# Altium PCB receiver.PcbDoc
Units mm, origin at the board's own origin, x right, y up, seen from the top; angles counter-clockwise.
Board outline 95.88 x 55.37 mm, 2 copper layers (Top Layer, Bottom Layer); 19 components, 11 nets, 46 pads, 14 vias.
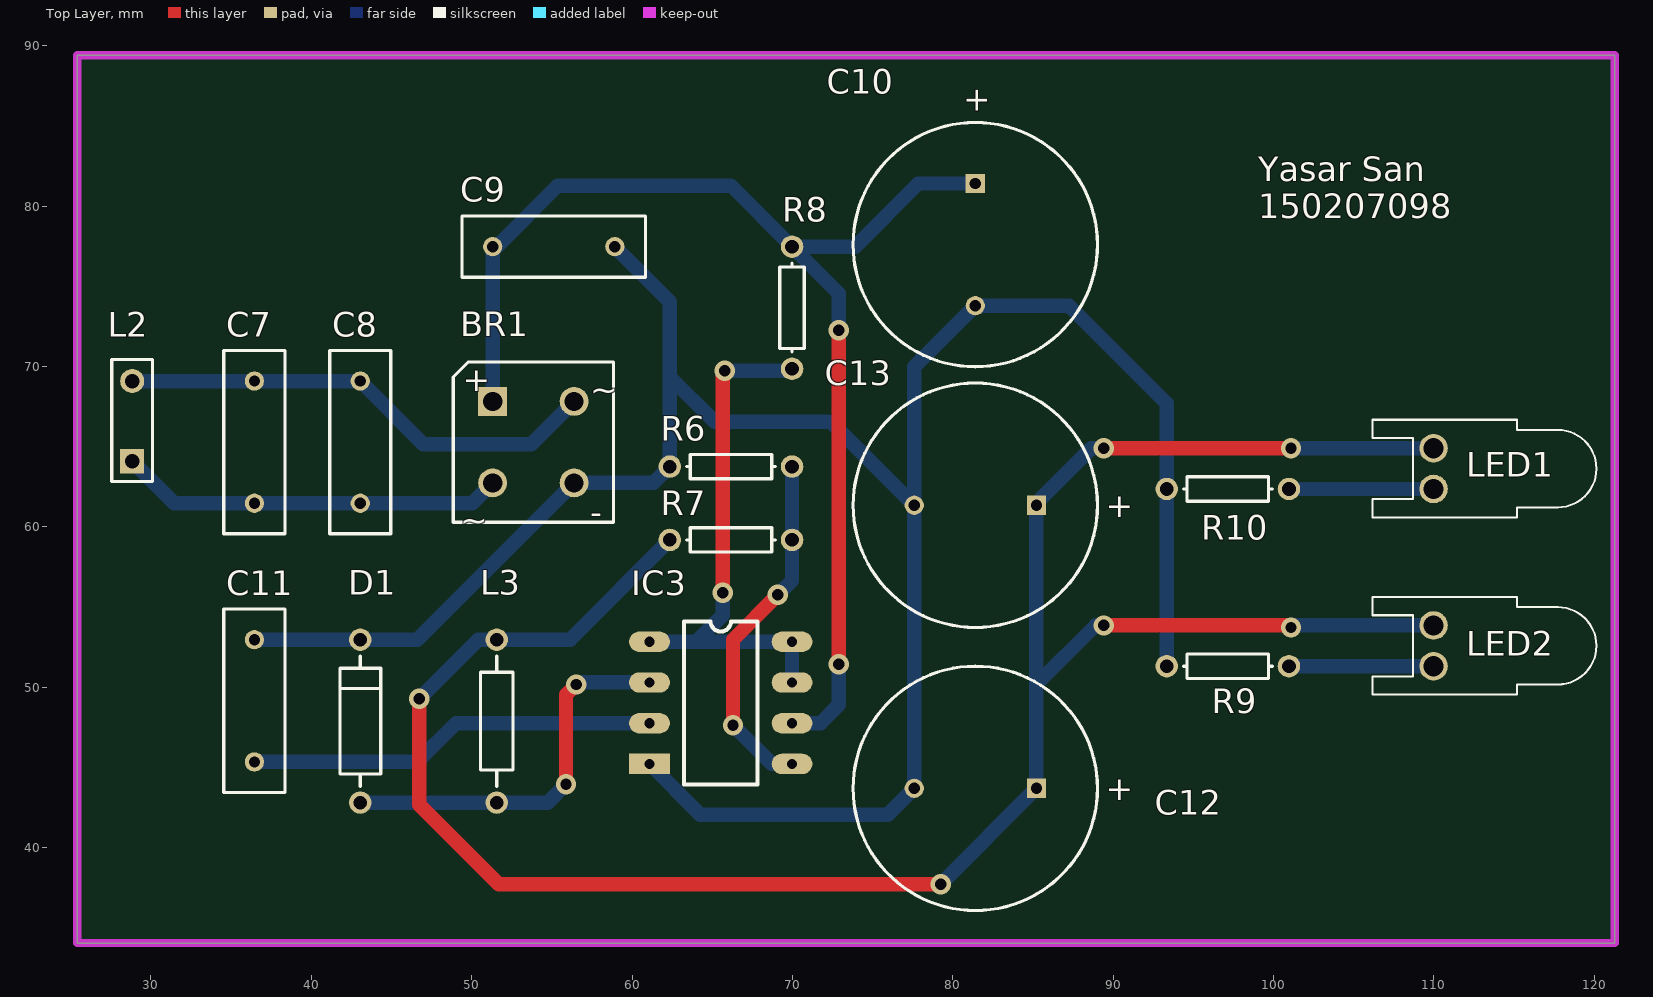
[diagram p0: Top Layer view]
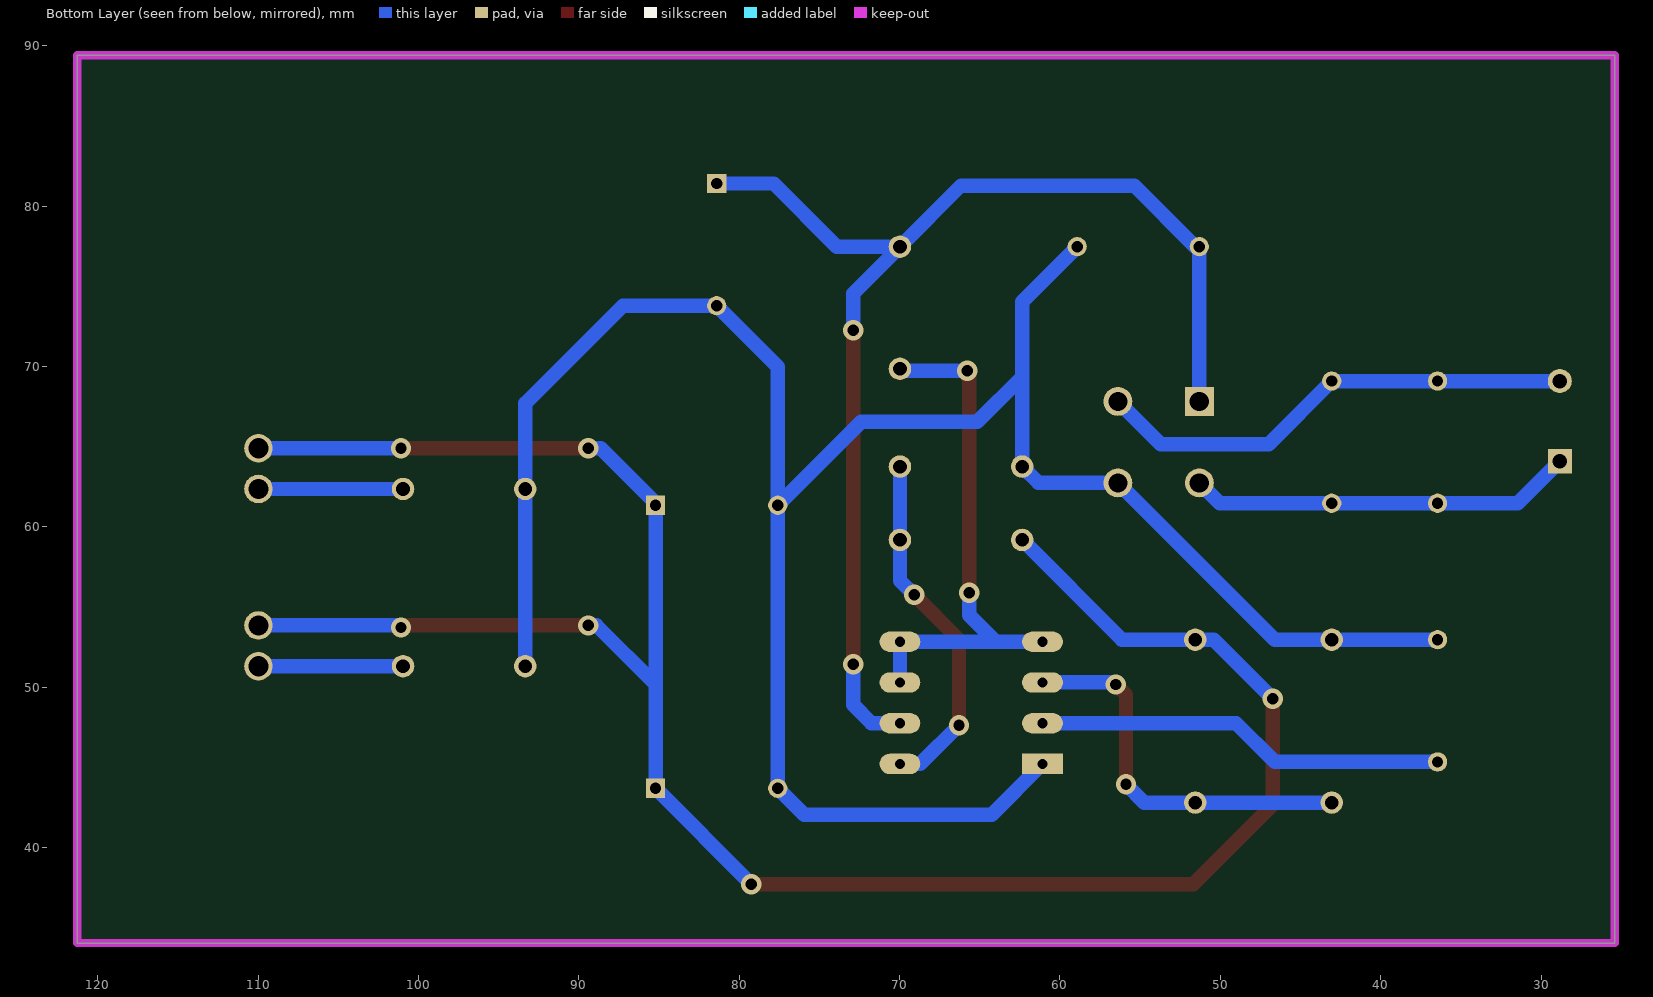
[diagram p1: Bottom Layer view, seen from below]

## Layer stack, top to bottom
Top Solder: solder mask 0.0102, Solder Resist, Dk 3.5
Top Layer: signal copper 0.0356
Dielectric 1: dielectric 0.32, FR-4, Dk 4.8
Bottom Layer: signal copper 0.0356
Bottom Solder: solder mask 0.0102, Solder Resist, Dk 3.5

## Board outline
25.4,34.036 121.285,34.036 121.285,89.408 25.4,89.408

## Design rules (kind name [scope] priority, off if disabled: settings)
Clearance [All] p1: gap=0.254 ignorepadtopadclearanceinfootprint=FALSE except(0: Arc-Hole Track-Hole SMDPad-Hole THPad-Hole Via-Hole Fill-Hole Poly-Hole Region-Hole Text-Hole)
PolygonConnect [All] p1: connectstyle=Relief reliefconductorwidth=0.254 reliefentries=4 polygonreliefangle="90 Angle" airgapwidth=0.254
RoutingVias [All] p1: holewidth=0.711 width=1.27 viastyle="Through Hole" minholewidth=0.711 minwidth=1.27 maxholewidth=0.711 maxwidth=1.27
SolderMaskExpansion [All] p1: expansion=0.102
Width [All] p1: maxlimit=1.1 minlimit=0.9 preferedwidth=1 minimp=50.000000 maximp=50.000000 favimp=50.000000
30 further rules are at their usual default settings.

## Components (designator, comment, footprint, x,y, rotation, side; value= is the part's Value field where it differs from the comment)
BR1 "Bridge DB107" D-38 53.848,65.278 r0 top
C7 "Cap" RAD-0.3 36.449,65.278 r90 top value=180nF
C8 "Cap" RAD-0.3 43.053,65.278 r90 top value=12nF
C9 "Cap" RAD-0.3 55.118,77.47 r180 top value=0.01uF
C10 "Cap Pol" RB7.6-15 81.407,77.597 r90 top value="220uF 25V"
C11 "Cap" RAD-0.3 36.449,49.149 r270 top value=470pF
C12 "Cap Pol" RB7.6-15 81.407,43.688 r0 top value="220uF 25V"
C13 "Cap Pol" RB7.6-15 81.407,61.341 r0 top value="220uF 25V"
D1 "1N5819" DIODE-0.4 43.053,47.879 r90 top
IC3 "MC34063" PDIP-8 61.087,52.832 r0 top
L2 "Inductor" HDR1X2 28.829,64.088 r90 top value=195uH
L3 "Inductor" AXIAL-0.4 51.562,47.879 r90 top value=220uH
LED1 "LED2" LED-0 109.982,63.627 r90 top (schematic designator D3)
LED2 "LED1" LED-0 109.982,52.578 r90 top (schematic designator D2)
R6 "Res" AXIAL-0.3 66.167,63.754 r0 top value=1K
R7 "Res" AXIAL-0.3 66.167,59.182 r0 top value=1K
R8 "Res" AXIAL-0.3 69.977,73.66 r90 top value=1K
R9 "Res" AXIAL-0.3 97.155,51.308 r180 top value=1K
R10 "Res" AXIAL-0.3 97.155,62.357 r180 top value=1K

## Footprints (in the part's own frame and the unit in brackets; to place one, negate y for a bottom-side part, rotate by r counter-clockwise, add the part's x,y. Pads: shape width x height; smd on the part's side, far side on the other; paste and mask are expansions set on the pad)
AXIAL-0.3 [mm] "Axial Device, Thru-Hole; 2 Leads; 0.3 in Pin Spacing"
  round 1.4 hole 0.85: 1(-3.81,0) 2(3.81,0)
  silkscreen extent -2.77,-0.76 2.77,0.76
AXIAL-0.4 [mm] "Axial Device, Thru-Hole; 2 Leads; 0.4 in Pin Spacing"
  round 1.4 hole 0.85: 1(-5.08,0) 2(5.08,0)
  silkscreen extent -4.06,-1.02 4.06,1.02
D-38 [mm] "Bridge Rectifier; 4 Terminals; Body 9.4 x 9.4 mm (typ); Pitch 5.08 mm"
  rect 1.8x1.8 hole 1.2: 1(-2.54,2.54)
  round 1.8 hole 1.2: 2(-2.54,-2.54) 3(2.54,-2.54) 4(2.54,2.54)
  silkscreen extent -5,-5 5,5, body extent -5,-5 5,5, height 9.91
DIODE-0.4 [mm] "Diode, Thru-Hole; 2 Leads; 0.4 in Pin Spacing"
  round 1.4 hole 0.85: 1(-5.08,0) 2(5.08,0)
  silkscreen extent -4.06,-1.27 4.06,1.27
HDR1X2 [mm] "Connector; Header; 2 Position"
  rect 1.5x1.5 hole 0.9: 1(0,0)
  round 1.5 hole 0.9: 2(5,0)
  silkscreen extent -1.27,-1.27 6.35,1.27
LED-0 [mil] "LED; 2 Leads"
  round 70 hole 50: 1(50,0) 2(-50,0)
  silkscreen extent -120,-400 120,150
PDIP-8 [mm]
  oval 2.54x1.27 hole 0.635: 1(0,0) 2(0,-2.54) 3(0,-5.08) 5(8.89,-7.62) 6(8.89,-5.08) 7(8.89,-2.54) 8(8.89,0)
  rect 2.54x1.27 hole 0.635: 4(0,-7.62)
  silkscreen extent 2.16,-8.89 6.73,1.27
RAD-0.3 [mm] "Radial Cap, Thru-Hole; 2 Leads; 0.3 in Pin Spacing"
  round 1.2 hole 0.7: 1(-3.81,0) 2(3.81,0)
  silkscreen extent -5.71,-1.91 5.71,1.91
RB7.6-15 [mm] "Polarized Capacitor (Radial); 2 Leads"
  rect 1.2x1.2 hole 0.7: 1(3.81,0)
  round 1.2 hole 0.7: 2(-3.81,0)
  silkscreen extent -7.62,-7.62 7.62,7.62

## Part data
BR1: library part Bridge1, "Full Wave Diode Bridge", DatasheetVersion=E2732B, LatestRevisionDate=29-May-2009, LatestRevisionNote="Sch pins A & K swapped.", PackageDescription="Bridge Rectifier; 4 Terminals; Body 9.4 x 9.4 mm (typ); Pitch 5.08 mm", PackageReference=D-38, Published=8-Jun-2000, Publisher="Altium Limited"
C7 C8 C9 C11: "Capacitor", LatestRevisionDate=17-Jul-2002, LatestRevisionNote="Re-released for DXP Platform.", PackageDescription="Radial Cap, Thru-Hole; 2 Leads; 0.3 in Pin Spacing", PackageReference=RAD-0.3, Published=8-Jun-2000, Publisher="Altium Limited"
C10 C12 C13: library part "Cap Pol1", "Polarized Capacitor (Radial)", LatestRevisionDate=17-Jul-2002, LatestRevisionNote="Re-released for DXP Platform.", PackageDescription="Polarized Capacitor (Radial); 2 Leads", PackageReference=RB7.6-15, Published=8-Jun-2000, Publisher="Altium Limited"
D1: library part "Diode 10TQ035", "Schottky Rectifier", ComponentLink1Description="Manufacturer Link", ComponentLink1URL=http://www.irf.com/, ComponentLink2Description=Datasheet, ComponentLink2URL=http://www.irf.com/product-info/datasheets/data/10tq.pdf, DatasheetVersion=PD-2.057B, LatestRevisionDate=17-Jul-2002, LatestRevisionNote="Re-released for DXP Platform.", Note="Terminal 2 is the TAB and is electrically connected to the cathode", PackageDescription="TO, Thru-Hole, Vertical, Heatsink Mounted; 3 In-Line Leads (1 Absent); Pitch 2.54 mm", PackageReference=TO-220AC, PackageVersion=Feb-1998, Published=8-Jun-2000, Publisher="Altium Limited"
LED1 LED2: library part LED0, "Typical INFRARED GaAs LED", LatestRevisionDate=08-Jul-2005, LatestRevisionNote="Mech Layer 1 removed.", PackageDescription="LED; 2 Leads", PackageReference=LED-0, Published=8-Jun-2000, Publisher="Altium Limited"
R6 R7 R8 R9 R10: library part Res1, "Resistor", LatestRevisionDate=17-Jul-2002, LatestRevisionNote="Re-released for DXP Platform.", PackageDescription="Axial Device, Thru-Hole; 2 Leads; 0.3 in Pin Spacing", PackageReference=AXIAL-0.3, Published=8-Jun-2000, Publisher="Altium Limited"
L2 L3: Code_IEC=1005, Code_JEITA=0402, LatestRevisionDate=29-May-2009, LatestRevisionNote="IPC-7351 Footprint Added.", PackageDescription="Chip Inductor", PackageReference=0402-A, Published=8-Jun-2000, Publisher="Altium Limited"

## Via types
v1: diameter 1.27, hole 0.711, Top Layer to Bottom Layer, 14 vias

## Nets (pads, with @x,y where several pads share a name; then routed paths per layer and width w, separated by ;. In a path a pad name is that pad's centre, name@x,y a point inside that pad or via, vN(x,y) a via of type N, cw(c..) or ccw(c..) an arc to the next point about the centre after c; other vN are vias at no path point)
GND: BR1.3 C9.1 C10.2 C11.1 C12.2 C13.2 D1.2 IC3.4 R6.1 R9.2 R10.2 | length 145.1
  Bottom Layer w0.9: C11.1 D1.2 46.609,52.959 BR1.3 61.341,62.738 R6.1 62.357,69.342 ; C9.1 62.357,74.041 62.357,69.342 ; IC3.4 64.262,42.037 75.946,42.037 C12.2 C13.2 ; R9.2 R10.2 93.345,67.691 87.249,73.787 C10.2 77.597,69.977 C13.2 ; 62.357,69.342 65.151,66.548 72.39,66.548 C13.2
NetBR1_1: BR1.1 C9.2 C10.1 IC3.6 R8.2 | length 77.7
  Top Layer w0.9: v1(72.898,51.435) v1(72.898,72.263)
  Bottom Layer w0.9: BR1.1 C9.2 51.562,77.47 55.372,81.28 66.167,81.28 R8.2 ; IC3.6 71.755,47.752 72.898,48.895 v1(72.898,51.435) ; v1(72.898,72.263) 72.898,74.549 R8.2 ; C10.1 77.851,81.407 73.914,77.47 R8.2
NetBR1_2: BR1.2 C7.1 C8.1 L2.1 | length 24.1
  Bottom Layer w0.9: L2.1 31.449,61.468 C7.1 C8.1 50.038,61.468 BR1.2
NetBR1_4: BR1.4 C7.2 C8.2 L2.2 | length 30.3
  Bottom Layer w0.9: L2.2 C7.2 C8.2 46.99,65.151 53.721,65.151 BR1.4
NetC11_2: C11.2 IC3.3 | length 25.6
  Bottom Layer w0.9: C11.2 46.609,45.339 49.022,47.752 IC3.3
NetC12_1: C12.1 C13.1 L3.2 LED1.1 LED2.1 R7.1 | length 139.7
  Top Layer w0.9: v1(46.736,49.276) 46.736,42.672 51.689,37.719 v1(79.248,37.719) ; v1(89.408,53.848) 100.965,53.848 v1(101.092,53.721) ; v1(89.408,64.897) v1(101.092,64.897)
  Bottom Layer w0.9: v1(46.736,49.276) 50.419,52.959 L3.2 56.134,52.959 R7.1 ; v1(79.248,37.719) C12.1 85.217,50.165 ; v1(89.408,53.848) 88.9,53.848 85.217,50.165 ; v1(89.408,64.897) 88.646,64.897 85.217,61.468 C13.1 85.217,50.165 ; v1(101.092,53.721) 101.219,53.848 LED2.1 ; v1(101.092,64.897) LED1.1
NetD1_1: D1.1 IC3.2 L3.1 | length 24.4
  Top Layer w0.9: v1(55.88,43.942) 55.88,49.53 v1(56.515,50.165)
  Bottom Layer w0.9: D1.1 L3.1 54.737,42.799 v1(55.88,43.942) ; v1(56.515,50.165) 56.642,50.292 IC3.2
NetD2_2: LED2.2 R9.1 | length 9
  Bottom Layer w0.9: R9.1 LED2.2
NetD3_2: LED1.2 R10.1 | length 9
  Bottom Layer w0.9: R10.1 LED1.2
NetIC3_1: IC3.1 IC3.7 IC3.8 R8.1 | length 33.3
  Top Layer w0.9: v1(65.659,55.88) 65.659,69.596 v1(65.786,69.723)
  Bottom Layer w0.9: IC3.1 64.008,52.832 ; v1(65.659,55.88) 65.659,54.483 64.008,52.832 ; v1(65.786,69.723) 69.85,69.723 R8.1 ; IC3.7 IC3.8 64.008,52.832
NetIC3_5: IC3.5 R6.2 R7.2 | length 22.3
  Top Layer w0.9: v1(66.294,47.625) 66.294,52.959 v1(69.088,55.753)
  Bottom Layer w0.9: v1(66.294,47.625) 68.707,45.212 IC3.5 ; v1(69.088,55.753) 69.977,56.642 R7.2 R6.2

## Keep-outs
Keep-Out Layer:
  the board outline again, w0.508

## Silkscreen, mask and mechanical layers (free items; w line width, h text height)
Top Overlay:
  text "Yasar San / 150207098" at 99.06,79.248 h1.52

## Text inside footprints (layer, text, board x,y; h text height)
BR1: Top Overlay "+" at 49.438,68.442 h1.5; Top Overlay "-" at 57.404,60.198 h1.5; Top Overlay "~" at 49.276,59.69 h1.5; Top Overlay "~" at 57.404,67.818 h1.5
C10: Top Overlay "+" at 82.144,85.729 h1.5 r90
C12: Top Overlay "+" at 89.539,42.951 h1.5
C13: Top Overlay "+" at 89.539,60.604 h1.5